# EAGLE board LautIO (EAGLE 9.6.2), part 1 of 2
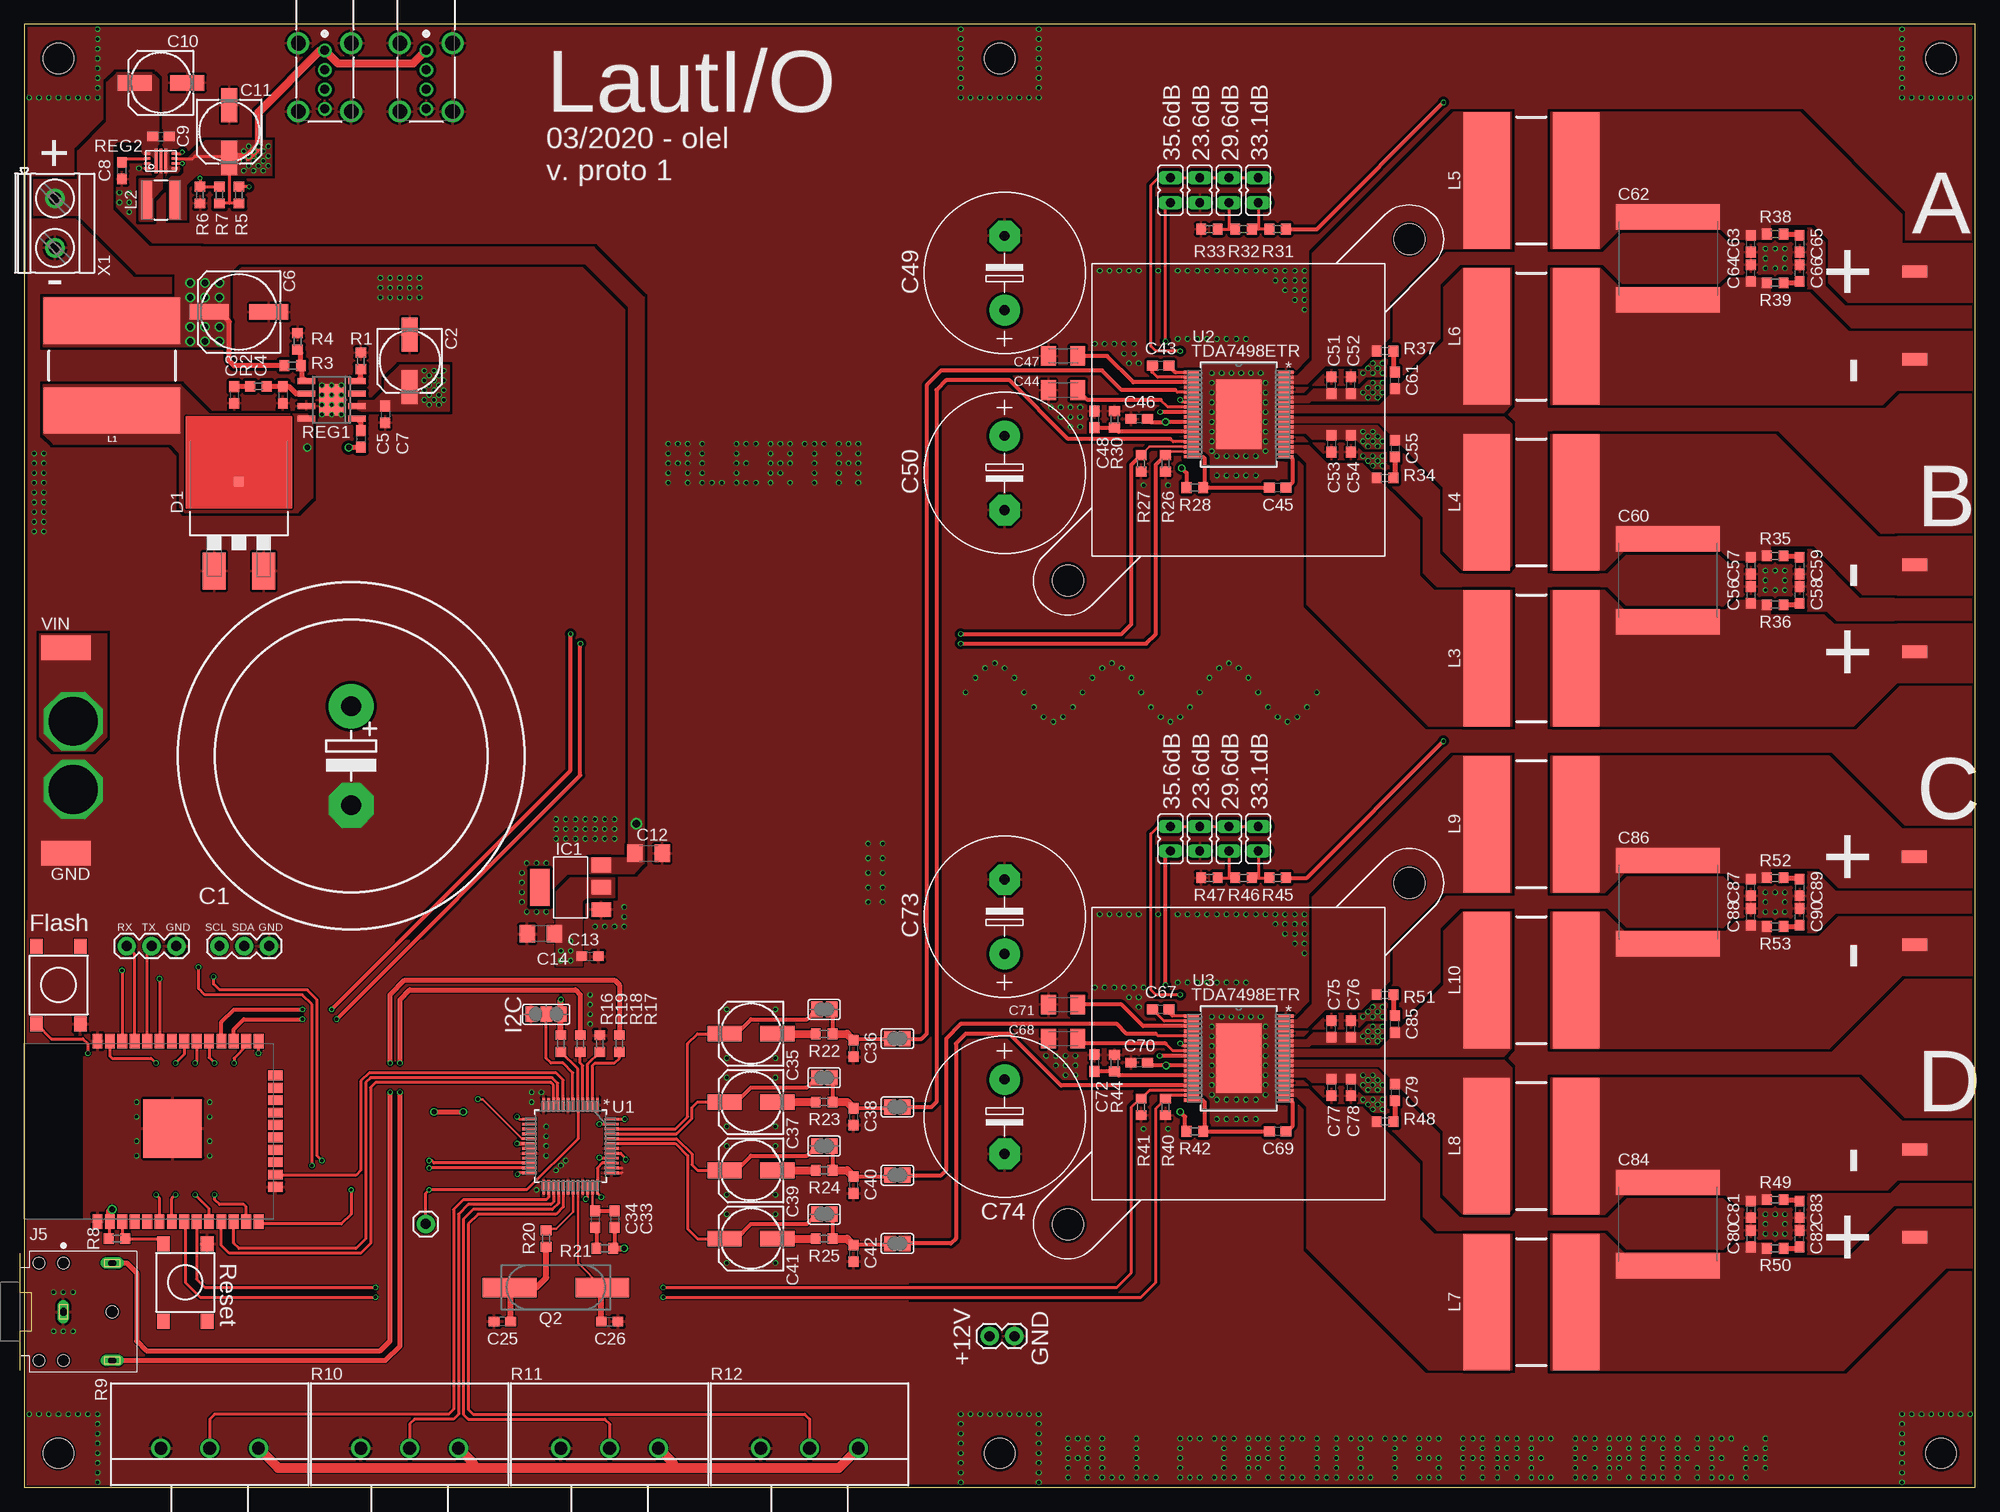
[diagram p0: board, top side]
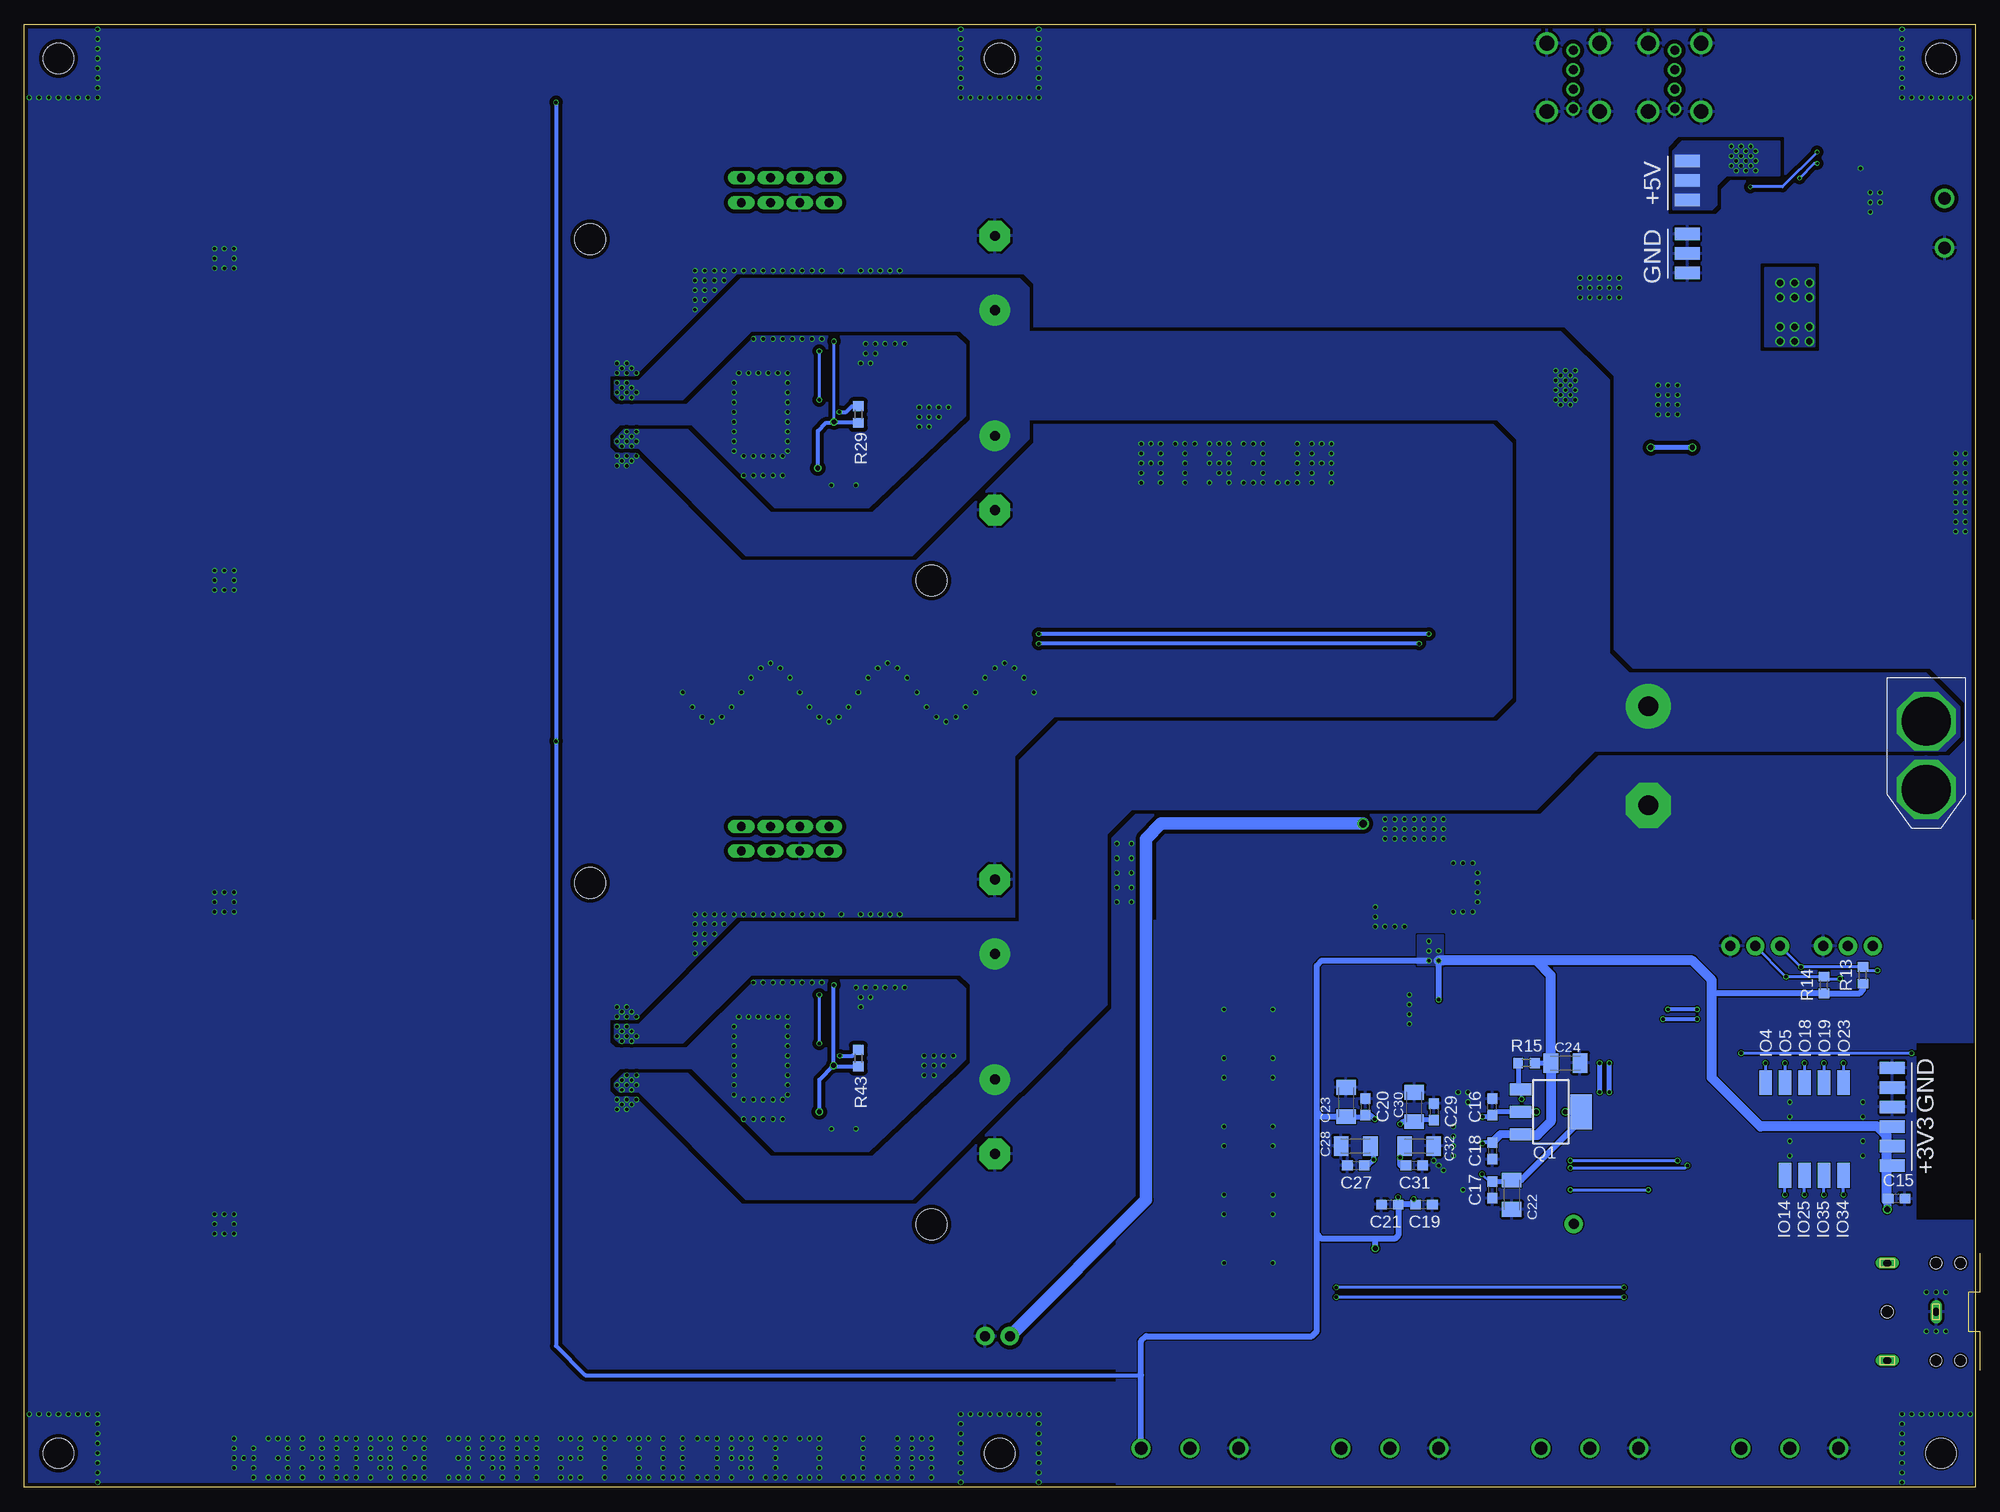
[diagram p1: board, bottom side, seen from below]

Size 200 x 150 mm. Coordinates in mm from the lower left corner, seen from the top.
Outline: 0,0 200,0 200,150 0,150 0,0
Copper layers (1*16): Top 0.035559375mm / dielectric 1.6mm / Bottom 0.035559375mm
Design rules "jlcpcb2layer": minimum track width 5mil, minimum drill 12mil, track to track 5mil, track to pad 5mil, pad to pad 5mil, via to via 5mil, smd to smd 5mil, copper to edge 8mil, drill to drill 6mil, minimum pad ring 5mil, minimum via ring 3mil, stop-mask expansion 2.5mil, vias tented up to drill 0mil, thermal gap 10mil
Holes 3.1 mm at 3.5,146.5 3.5,3.5 196.5,3.5 196.5,146.5 100,3.5 100,146.5

## Footprints (pad centres in the part's own frame; a part is rotated, then mirrored left to right if it is on the bottom)
EB35D = drill 2.007 pad 4.597: + -5.08,0 | drill 2.007 pad 4.597 octagon: - 5.08,0
153CLV-0605 = smd 3.5 x 1.6: + 2.7,0; - -2.7,0
C0603 = smd 1.1 x 1: 1 -0.85,0; 2 0.85,0
153CLV-0807 = smd 4 x 1.6: + 3.05,0; - -3.05,0
C1206 = smd 1.6 x 1.8: 1 -1.4,0; 2 1.4,0
C1206K = smd 1.5 x 2: 1 -1.5,0; 2 1.5,0
E7,5-16 = drill 1.016 pad 3.15: + -3.81,0 | drill 1.016 pad 3.15 octagon: - 3.81,0
C3640 = smd 2.6 x 10.7: 1 -4.267,0; 2 4.267,0
TO-263/D2PAK = smd 2.32 x 3.81: 1 -2.54,-7.045; 3 2.54,-7.045 | smd 1 x 1: 2 0,2.125
ESP-WROOM-32 = smd 1.5 x 1: 1 -9.25,7; 2 -9.25,5.73; 3 -9.25,4.46; 4 -9.25,3.19; 5 -9.25,1.92; 6 -9.25,0.65; 7 -9.25,-0.62; 8 -9.25,-1.89; 9 -9.25,-3.16; 10 -9.25,-4.43; 11 -9.25,-5.7; 12 -9.25,-6.97; 13 -9.25,-8.24; 14 -9.25,-9.51; 25 9.25,-9.51; 26 9.25,-8.24; 27 9.25,-6.97; 28 9.25,-5.7; 29 9.25,-4.43; 30 9.25,-3.16; 31 9.25,-1.89; 32 9.25,-0.62; 33 9.25,0.65; 34 9.25,1.92; 35 9.25,3.19; 36 9.25,4.46; 37 9.25,5.73; 38 9.25,7 | smd 1 x 1.5: 15 -5.7,-11.25; 16 -4.43,-11.25; 17 -3.16,-11.25; 18 -1.89,-11.25; 19 -0.62,-11.25; 20 0.65,-11.25; 21 1.92,-11.25; 22 3.19,-11.25; 23 4.46,-11.25; 24 5.73,-11.25 | smd 6 x 6: GND 0.3,-0.7
SMD2,54-5,08 = smd 2.54 x 5.08: 1 0,0
SOT223 = smd 1.499 x 2.007: 1 -2.261,-3.15; 2 0.025,-3.15; 3 2.311,-3.15 | smd 3.81 x 2.007: 4 0,3.15
SMD1,27-2,54 = smd 1.27 x 2.54: 1 0,0
614004134726 = drill 0.92: 1 0,2.41; 2 0,4.41; 3 0,6.41; 4 0,8.41 | drill 1.5: S1 -2.71,8.68; S2 2.71,8.68; S3 2.71,1.68; S4 -2.71,1.68
1X03 = drill 1.016 pad 1.88: 1 0,0; 2 2.54,0; 3 5.08,0
CUI_SJ1-3523N = drill 0.8 long: 1 0,0; 2 5,-5; 3 5,5 | hole 1.2: -2.5,5; 0,5; 5,0; -2.5,-5; 0,-5
1X01 = drill 1.016 pad 1.88: 1 0,0
1X02 = drill 1.016 pad 1.88: 1 0,0; 2 2.54,0
JP1 = drill 0.914 long: 1 0,-1.27; 2 0,1.27
INDUCTOR_SDR1307 = smd 14 x 4.75: P$1 0,4.6; P$2 0,-4.6
INDUCTOR_4X4MM = smd 4.089 x 1.143: P$1 0,1.473; P$2 0,-1.473
SOT223' = smd 1.219 x 2.235: 1 -2.311,-3.099; 2 0,-3.099; 3 2.311,-3.099 | smd 3.6 x 2.2: 4 0,3.099
CSM-7X-DU = smd 5.5 x 2: 1 -4.75,0; 2 4.75,0
R0603 = smd 1 x 1.1: 1 -0.85,0; 2 0.85,0
CIP20C-6MM = drill 1.3 pad 1.93: A -5,0; E 5,0; S 0,0
HSOP8 = smd 0.6 x 1.8: 1 -1.905,-2.6; 2 -0.635,-2.6; 3 0.635,-2.6; 4 1.905,-2.6; 5 1.905,2.6; 6 0.635,2.6; 7 -0.635,2.6; 8 -1.905,2.6 | smd 3.2 x 2.51: EXP 0,0
RGX0011A = smd 2.5 x 0.3: 1 0,0.5; 2 0,0; 3 0,-0.5 | smd 0.25 x 0.6: 4 -0.75,-1.4; 5 -0.25,-1.4; 6 0.25,-1.4; 7 0.75,-1.4; 8 0.75,1.4; 9 0.25,1.4; 10 -0.25,1.4; 11 -0.75,1.4
TACTILE_SWITCH_SMD_6.2MM_TALL = smd 1.55 x 1.3: A1 -3.975,-2.25; A2 3.975,-2.25; B1 -3.975,2.25; B2 3.975,2.25
SJ_2 = smd 1.168 x 1.6: 1 -1.524,0; 2 0,0; 3 1.524,0
SJ = smd 1.168 x 1.6: 1 -0.762,0; 2 0.762,0
ST_48_ADI = smd 1.462 x 0.279: 1 -4.216,2.75; 2 -4.216,2.25; 3 -4.216,1.75; 4 -4.216,1.25; 5 -4.216,0.75; 6 -4.216,0.25; 7 -4.216,-0.25; 8 -4.216,-0.75; 9 -4.216,-1.25; 10 -4.216,-1.75; 11 -4.216,-2.25; 12 -4.216,-2.75; 25 4.216,-2.75; 26 4.216,-2.25; 27 4.216,-1.75; 28 4.216,-1.25; 29 4.216,-0.75; 30 4.216,-0.25; 31 4.216,0.25; 32 4.216,0.75; 33 4.216,1.25; 34 4.216,1.75; 35 4.216,2.25; 36 4.216,2.75 | smd 0.279 x 1.462: 13 -2.75,-4.216; 14 -2.25,-4.216; 15 -1.75,-4.216; 16 -1.25,-4.216; 17 -0.75,-4.216; 18 -0.25,-4.216; 19 0.25,-4.216; 20 0.75,-4.216; 21 1.25,-4.216; 22 1.75,-4.216; 23 2.25,-4.216; 24 2.75,-4.216; 37 2.75,4.216; 38 2.25,4.216; 39 1.75,4.216; 40 1.25,4.216; 41 0.75,4.216; 42 0.25,4.216; 43 -0.25,4.216; 44 -0.75,4.216; 45 -1.25,4.216; 46 -1.75,4.216; 47 -2.25,4.216; 48 -2.75,4.216
SSO36_TDA7498ETR_STM = smd 1.538 x 0.356: 1 4.826,4.318; 2 4.826,3.81; 3 4.826,3.302; 4 4.826,2.794; 5 4.826,2.286; 6 4.826,1.778; 7 4.826,1.27; 8 4.826,0.762; 9 4.826,0.254; 10 4.826,-0.254; 11 4.826,-0.762; 12 4.826,-1.27; 13 4.826,-1.778; 14 4.826,-2.286; 15 4.826,-2.794; 16 4.826,-3.302; 17 4.826,-3.81; 18 4.826,-4.318; 19 -4.826,-4.318; 20 -4.826,-3.81; 21 -4.826,-3.302; 22 -4.826,-2.794; 23 -4.826,-2.286; 24 -4.826,-1.778; 25 -4.826,-1.27; 26 -4.826,-0.762; 27 -4.826,-0.254; 28 -4.826,0.254; 29 -4.826,0.762; 30 -4.826,1.27; 31 -4.826,1.778; 32 -4.826,2.286; 33 -4.826,2.794; 34 -4.826,3.302; 35 -4.826,3.81; 36 -4.826,4.318 | smd 4.699 x 7.112: EPAD 0,0
XT60 = drill 5 octagon: + 4.5,0; - 11.5,0
ATS-CPX030030030 = hole 3.175: -2.519,-2.534; 32.481,32.466
MKDSN1,5/2-5,08 = drill 1.3 pad 2: 1 -2.561,0.025; 2 2.519,0.025

## Placement (x,y rotation side)
C1  10000µF  [EB35D]  33.5,75 270 top
C2  10µF  [153CLV-0605]  39.5,115.5 270 top
C3  1.2nF  [C0603]  21.5,112 270 top
C4  6.8pF  [C0603]  26.5,112 270 top
C5  100nF  [C0603]  34.5,107.5 270 top
C6  47µF  [153CLV-0807]  22,120.5 180 top
C7  100nF  [C0603]  37,110 270 top
C8  2.2nF  [C0603]  10,135 90 top
C9  100nF  [C0603]  14,138.5 0 top
C10  10µF  [153CLV-0605]  14,144 180 top
C11  10µF  [153CLV-0605]  21,139 270 top
C12  10µF  [C1206]  64,65 0 top
C13  10µF  [C1206]  52.95,56.75 180 top
C14  100nF  [C0603]  58,54.45 0 top
C15  100nF  [C0603]  8.05,29.6 180 bottom
C16  100n  [C0603]  49.5,39 90 bottom
C17  100n  [C0603]  49.5,30.5 270 bottom
C18  100n  [C0603]  49.5,34.5 270 bottom
C19  100n  [C0603]  56.5,29 0 bottom
C20  100n  [C0603]  62.5,39 90 bottom
C21  100n  [C0603]  60,29 180 bottom
C22  10µF  [C1206K]  47.5,30 270 bottom
C23  10µF  [C1206K]  64.5,39.5 90 bottom
C24  10µF  [C1206K]  42,43.5 0 bottom
C25  22pF  [C0603]  49,17 180 top
C26  22pF  [C0603]  60,17 0 top
C27  100n  [C0603]  63.5,33 0 bottom
C28  10µF  [C1206K]  63.5,35 0 bottom
C29  100n  [C0603]  55.5,38.5 270 bottom
C30  10µF  [C1206K]  57.5,39 270 bottom
C31  100n  [C0603]  57.5,33 180 bottom
C32  47µF  [C1206K]  57,35 180 bottom
C33  3.3nF  [C0603]  60.5,27.5 270 top
C34  56nF  [C0603]  58.5,27.5 270 top
C35  47µF  [153CLV-0605]  74.5,46.5 180 top
C36  5.6nF  [C0603]  85,45 270 top
C37  47µF  [153CLV-0605]  74.5,39.5 180 top
C38  5.6nF  [C0603]  85,38 270 top
C39  47µF  [153CLV-0605]  74.5,32.5 180 top
C40  5.6nF  [C0603]  85,31 270 top
C41  47µF  [153CLV-0605]  74.5,25.5 180 top
C42  5.6nF  [C0603]  85,24 270 top
C43  100nF  [C0603]  116.5,115 180 top
C44  10µF  [C1206K]  106.5,112.5 180 top
C45  100nF  [C0603]  128.5,102.5 180 top
C46  100nF  [C0603]  114.3,109.55 180 top
C47  10µF  [C1206K]  106.5,116 180 top
C48  100nF  [C0603]  109.7,109.5 270 top
C49  1000µF  [E7,5-16]  100.5,124.5 90 top
C50  1000µF  [E7,5-16]  100.5,104 270 top
C51  1µF  [C0603]  134,113 90 top
C52  100nF  [C0603]  136,113 90 top
C53  1µF  [C0603]  134,107 270 top
C54  100nF  [C0603]  136,107 270 top
C55  330pF  [C0603]  140.5,106.5 270 top
C56  220nF  [C0603]  177,91.5 270 top
C57  220nF  [C0603]  177,94.5 270 top
C58  220nF  [C0603]  182,91.5 90 top
C59  220nF  [C0603]  182,94.5 270 top
C60  1µF  [C3640]  168.5,93 90 top
C61  330pF  [C0603]  140.5,113.5 90 top
C62  1µF  [C3640]  168.5,126 270 top
C63  220nF  [C0603]  177,127.5 90 top
C64  220nF  [C0603]  177,124.5 90 top
C65  220nF  [C0603]  182,127.5 270 top
C66  220nF  [C0603]  182,124.5 90 top
C67  100nF  [C0603]  116.5,49 180 top
C68  10µF  [C1206K]  106.5,46 180 top
C69  100nF  [C0603]  128.5,36.5 180 top
C70  100nF  [C0603]  114.3,43.55 180 top
C71  10µF  [C1206K]  106.5,49.5 180 top
C72  100nF  [C0603]  109.7,43.5 270 top
C73  1000µF  [E7,5-16]  100.5,58.5 90 top
C74  1000µF  [E7,5-16]  100.5,38 270 top
C75  1µF  [C0603]  134,47 90 top
C76  100nF  [C0603]  136,47 90 top
C77  1µF  [C0603]  134,41 270 top
C78  100nF  [C0603]  136,41 270 top
C79  330pF  [C0603]  140.5,40.5 270 top
C80  220nF  [C0603]  177,25.5 270 top
C81  220nF  [C0603]  177,28.5 270 top
C82  220nF  [C0603]  182,25.5 90 top
C83  220nF  [C0603]  182,28.5 270 top
C84  1µF  [C3640]  168.5,27 90 top
C85  330pF  [C0603]  140.5,47.5 90 top
C86  1µF  [C3640]  168.5,60 270 top
C87  220nF  [C0603]  177,61.5 90 top
C88  220nF  [C0603]  177,58.5 90 top
C89  220nF  [C0603]  182,61.5 270 top
C90  220nF  [C0603]  182,58.5 90 top
D1  STPS20M100SG-TR  [TO-263/D2PAK]  22,101 0 top
ESP  ESP-WROOM-32  [ESP-WROOM-32]  14.5,36.5 90 top
GND  [SMD2,54-5,08]  4.28,65.01 90 top
IC1  REG1117  [SOT223]  56,61.5 90 top
IO4  [SMD1,27-2,54]  21.5,41.5 0 bottom
IO5  [SMD1,27-2,54]  19.5,41.5 0 bottom
IO14  [SMD1,27-2,54]  19.5,32 0 bottom
IO18  [SMD1,27-2,54]  17.5,41.5 0 bottom
IO19  [SMD1,27-2,54]  15.5,41.5 0 bottom
IO23  [SMD1,27-2,54]  13.5,41.5 0 bottom
IO25  [SMD1,27-2,54]  17.5,32 0 bottom
IO34  [SMD1,27-2,54]  13.5,32 0 bottom
IO35  [SMD1,27-2,54]  15.5,32 0 bottom
J1  614004134726  [614004134726]  30.8,149.75 180 top
J2  614004134726  [614004134726]  41.2,149.75 180 top
J3  455-1750-1-ND  [1X03]  10.5,55.5 0 top
J4  455-1750-1-ND  [1X03]  20,55.5 0 top
J5  SJ1-3523N  [CUI_SJ1-3523N]  4,18 0 top
J6  [1X01]  41.15,27 0 top
J7  [1X02]  101.5,15.5 180 top
JP1  [JP1]  126.5,133 0 top
JP2  [JP1]  123.5,133 0 top
JP3  [JP1]  120.5,133 0 top
JP4  [JP1]  117.5,133 0 top
JP5  [JP1]  126.5,66.5 0 top
JP6  [JP1]  123.5,66.5 0 top
JP7  [JP1]  120.5,66.5 0 top
JP8  [JP1]  117.5,66.5 0 top
L1  15µH  [INDUCTOR_SDR1307]  9,115 180 top
L2  1µH  [INDUCTOR_4X4MM]  14,132 90 top
L3  15µH  [INDUCTOR_SDR1307]  154.5,85 90 top
L4  15µH  [INDUCTOR_SDR1307]  154.5,101 90 top
L5  15µH  [INDUCTOR_SDR1307]  154.5,134 90 top
L6  15µH  [INDUCTOR_SDR1307]  154.5,118 90 top
L7  15µH  [INDUCTOR_SDR1307]  154.5,19 90 top
L8  15µH  [INDUCTOR_SDR1307]  154.5,35 90 top
L9  15µH  [INDUCTOR_SDR1307]  154.5,68 90 top
L10  15µH  [INDUCTOR_SDR1307]  154.5,52 90 top
OUT_A_+  [SMD1,27-2,54]  193.8,124.65 90 top
OUT_A_-  [SMD1,27-2,54]  193.8,115.65 90 top
OUT_B_+  [SMD1,27-2,54]  193.8,85.65 90 top
OUT_B_-  [SMD1,27-2,54]  193.8,94.6 90 top
OUT_C_+  [SMD1,27-2,54]  193.75,64.65 270 top
OUT_C_-  [SMD1,27-2,54]  193.8,55.65 270 top
OUT_D_+  [SMD1,27-2,54]  193.8,25.65 270 top
OUT_D_-  [SMD1,27-2,54]  193.8,34.65 270 top
PAD1  [SMD1,27-2,54]  8.5,41 270 bottom
PAD2  [SMD1,27-2,54]  8.5,33 270 bottom
PAD3  [SMD1,27-2,54]  8.5,43 270 bottom
PAD4  [SMD1,27-2,54]  8.5,37 270 bottom
PAD5  [SMD1,27-2,54]  29.5,132 270 bottom
PAD6  [SMD1,27-2,54]  29.5,134 270 bottom
PAD7  [SMD1,27-2,54]  29.5,136 270 bottom
PAD8  [SMD1,27-2,54]  29.5,124.5 270 bottom
PAD9  [SMD1,27-2,54]  29.5,126.5 270 bottom
PAD10  [SMD1,27-2,54]  8.5,35 270 bottom
PAD11  [SMD1,27-2,54]  8.5,39 270 bottom
PAD12  [SMD1,27-2,54]  29.5,128.5 270 bottom
Q1  ZX5T953  [SOT223']  43.5,38.5 270 bottom
Q2  12.288MHz  [CSM-7X-DU]  54.5,20.5 180 top
R1  187kΩ  [R0603]  34.5,115.5 270 top
R2  44.2kΩ  [R0603]  24,112.88 0 top
R3  147kΩ  [R0603]  27.5,115 180 top
R4  10.5kΩ  [R0603]  28,117.5 270 top
R5  100kΩ  [R0603]  22,132.5 270 top
R6  100kΩ  [R0603]  18,132.5 90 top
R7  619kΩ  [R0603]  20,132.5 270 top
R8  10kΩ  [R0603]  9.5,25.5 180 top
R9  [CIP20C-6MM]  19,4 0 top
R10  [CIP20C-6MM]  39.5,4 0 top
R11  [CIP20C-6MM]  60,4 0 top
R12  [CIP20C-6MM]  80.5,4 0 top
R13  4.7kΩ  [R0603]  11.5,52.5 90 bottom
R14  4.7kΩ  [R0603]  15.5,51.5 90 bottom
R15  1kΩ  [R0603]  46,43.5 0 bottom
R16  10kΩ  [R0603]  55,45.5 90 top
R17  18kΩ  [R0603]  61,45.5 90 top
R18  18kΩ  [R0603]  59,45.5 90 top
R19  18kΩ  [R0603]  57,45.5 90 top
R20  100Ω  [R0603]  53.5,25.5 270 top
R21  475Ω  [R0603]  59.5,24.5 180 top
R22  560Ω  [R0603]  82,46.5 180 top
R23  560Ω  [R0603]  82,39.5 180 top
R24  560Ω  [R0603]  82,32.5 180 top
R25  560Ω  [R0603]  82,25.5 180 top
R26  10kΩ  [R0603]  117,105 90 top
R27  10kΩ  [R0603]  114.5,105 90 top
R28  22Ω  [R0603]  120,102.5 0 top
R29  47kΩ  [R0603]  114.5,110 270 bottom
R30  10kΩ  [R0603]  111.75,109.5 270 top
R31  100kΩ  [R0603]  128.5,129 0 top
R32  100kΩ  [R0603]  125,129 0 top
R33  100kΩ  [R0603]  121.5,129 0 top
R34  22Ω  [R0603]  139.5,103.5 180 top
R35  8Ω  [R0603]  179.5,95.5 0 top
R36  8Ω  [R0603]  179.5,90.5 0 top
R37  22Ω  [R0603]  139.5,116.5 180 top
R38  8Ω  [R0603]  179.5,128.5 0 top
R39  8Ω  [R0603]  179.5,123.5 0 top
R40  10kΩ  [R0603]  117,39 90 top
R41  10kΩ  [R0603]  114.5,39 90 top
R42  22Ω  [R0603]  120,36.5 0 top
R43  47kΩ  [R0603]  114.5,44 270 bottom
R44  10kΩ  [R0603]  111.75,43.5 270 top
R45  100kΩ  [R0603]  128.5,62.5 0 top
R46  100kΩ  [R0603]  125,62.5 0 top
R47  100kΩ  [R0603]  121.5,62.5 0 top
R48  22Ω  [R0603]  139.5,37.5 180 top
R49  8Ω  [R0603]  179.5,29.5 0 top
R50  8Ω  [R0603]  179.5,24.5 0 top
R51  22Ω  [R0603]  139.5,50.5 180 top
R52  8Ω  [R0603]  179.5,62.5 0 top
R53  8Ω  [R0603]  179.5,57.5 0 top
REG1  TPS54560B-Q1  [HSOP8]  31.5,111.5 90 top
REG2  TPS621351RGXR  [RGX0011A]  14,136 90 top
S1  MOMENTARY-SWITCH-SPST-SMD-6.2MM-TALL  [TACTILE_SWITCH_SMD_6.2MM_TALL]  16.5,21 90 top
S2  MOMENTARY-SWITCH-SPST-SMD-6.2MM-TALL  [TACTILE_SWITCH_SMD_6.2MM_TALL]  3.5,51.5 270 top
SJ1  [SJ_2]  53.5,48.5 0 top
SJ2  [SJ]  89.5,39 0 top
SJ3  [SJ]  89.5,46 0 top
SJ4  [SJ]  89.5,32 0 top
SJ5  [SJ]  89.5,25 0 top
SJ6  [SJ]  82,49 0 top
SJ7  [SJ]  82,42 0 top
SJ8  [SJ]  82,35 0 top
SJ9  [SJ]  82,28 0 top
U1  ADAU1701JSTZ  [ST_48_ADI]  56,35 270 top
U2  TDA7498ETR  [SSO36_TDA7498ETR_STM]  124.5,110 0 top
U3  TDA7498ETR  [SSO36_TDA7498ETR_STM]  124.5,44 0 top
U$1  XT60  [XT60]  5.01,83.05 270 bottom
U$2  ATS-CPX030030030  [ATS-CPX030030030]  109.5,95.5 0 top
U$3  ATS-CPX030030030  [ATS-CPX030030030]  109.5,29.5 0 top
VIN  [SMD2,54-5,08]  4.28,86.09 90 top
X1  MKDSN1,5/2-5,08  [MKDSN1,5/2-5,08]  3.1,129.6 270 top

## Library data of the parts
C1-C90 = rcl; SPICEPREFIX: C
D1 REG1 U$2 U$3 = olelib
ESP = esp32
GND IO4 IO5 IO14 IO18 IO19 IO23 IO25 IO34 IO35 OUT_A_+ OUT_A_- OUT_B_+ OUT_B_- OUT_C_+ OUT_C_- OUT_D_+ OUT_D_- PAD1-PAD12 VIN = wirepad
IC1 = burr-brown; MPN: REG1117; OC_FARNELL: 1097566; OC_NEWARK: 14P6981
J1 J2 = o163744v244+Eagle_WR-USB+(rev20e); APPLICATION: USB 2.0; DATASHEET-URL: https://www.we-online.com/catalog/datasheet/614004134726.pdf; GERDER: Receptacle; INTERFACE-TYPE: Type A; IR1: 1.5A; MOUNT: THT; PACKAGING: Tray; PART-NUMBER: 614004134726; PINS: 4; TYPE: Up Right; WORKING-VOLTAGE: 30V(AC)
J3 J4 = SparkFun-Connectors; PROD_ID: XXX-00000
J5 = SJ1-3523N; MANUFACTURER: CUI; PARTREV: 1.02; STANDARD: Manufacturer recommendation
J6 J7 = SparkFun-Connectors
JP1-JP8 SJ1-SJ9 = jumper
L1 L3-L10 = SparkFun-Coils; PROD_ID: NDUC-12529
L2 = SparkFun-Coils; PROD_ID: NDUC-15245
Q1 = transistor-pnp
Q2 = crystal; OC_FARNELL: unknown; OC_NEWARK: unknown
R1-R8 R13-R53 = rcl; SPICEPREFIX: R
R9-R12 = pot
REG2 = TPS621351RGXR; AVAILABILITY: Warning; DESCRIPTION: 3-17V 4.0A Step-Down Converter with 1% accuracy and PFM/Forced-PWM in 2x3QFN 11-VQFN-HR -40 to 125; MF: Texas Instruments; MP: TPS621351RGXR; PACKAGE: VQFN-HR-11 Texas Instruments; PRICE: None; PURCHASE-URL: https://pricing.snapeda.com/search/part/TPS621351RGXR/?ref=eda
S1 S2 = SparkFun-Switches; PROD_ID: SWCH-11966; SF_SKU: COM-12992
U1 = olelib; BUILT_BY: EMA_UL_Team; MANUFACTURER_PART_NUMBER: ADAU1701JSTZ; SOURCELIBRARY: Analog_2015-01-06; VENDOR: Analog Devices Inc
U2 U3 = olelib; BUILT_BY: EMA_Kyle; COPYRIGHT: Copyright (C) 2018 Accelerated Designs. All rights reserved; DATASHEET: https://www.st.com/resource/en/datasheet/tda7498e.pdf; MANUFACTURER_PART_NUMBER: TDA7498ETR; SOURCELIBRARY: Add_to_database_2020-10-27; VENDOR: STMicroelectronics
U$1 = XT60
X1 = con-phoenix-508

## Nets
+3V3: C13.1 C14.1 C15.2 C18.1 C19.1 C20.1 C21.1 C23.1 C24.1 C33.2 ESP.2 IC1.2 PAD2.1 PAD4.1 PAD10.1 Q1.3 R8.2 R9.E R10.E R11.E R12.E R13.1 R14.1 R15.2 R16.2 R21.1 R31.2 R45.2 SJ1.3 U1.18 U1.34 U1.36 U1.39 U1.48
+5V: C11.+ J1.1 J2.1 L2.P$2 PAD5.1 PAD6.1 PAD7.1 R5.2 R7.2 REG2.6
+12V: C6.+ C9.1 C10.+ C12.1 IC1.3 J7.2 L1.P$2 R3.2 REG2.1 REG2.8 X1.1
A_LINE_A: C36.1 R22.1 SJ3.1 SJ6.2
A_LINE_B: C38.1 R23.1 SJ2.1 SJ7.2
A_LINE_C: C40.1 R24.1 SJ4.1 SJ8.2
A_LINE_D: C42.1 R25.1 SJ5.1 SJ9.2
AMP1_GAIN: JP1.2 JP2.2 JP3.2 JP4.2 U2.30
AMP1_IN_A: SJ2.2 U2.22
AMP1_IN_B: SJ3.2 U2.32
AMP1_MUTE: ESP.28 R27.2 U2.21
AMP1_OUTA_N: C55.1 L4.P$1 U2.10 U2.11
AMP1_OUTA_P: L3.P$1 R34.2 U2.16 U2.17
AMP1_OUTB_N: C61.1 L6.P$1 U2.8 U2.9
AMP1_PGND: C45.1 U2.18
AMP1_ROSC: C48.2 R30.2 U2.24
AMP1_STANDBY: ESP.27 R26.2 U2.20
AMP1_SYNCLK: U2.25
AMP1_VDDPW: C45.2 R28.2 U2.19
AMP1_VDDS: C46.1 JP4.1 R28.1 R29.2 U2.26
AMP1_VREF: C47.1 U2.34
AMP1_VSS: C43.1 U2.36
AMP2_GAIN: JP5.2 JP6.2 JP7.2 JP8.2 U3.30
AMP2_IN_A: SJ5.2 U3.22
AMP2_IN_B: SJ4.2 U3.32
AMP2_MUTE: ESP.9 R41.2 U3.21
AMP2_OUTA_N: C79.1 L8.P$1 U3.10 U3.11
AMP2_OUTA_P: L7.P$1 R48.2 U3.16 U3.17
AMP2_OUTB_N: C85.1 L10.P$1 U3.8 U3.9
AMP2_OUTB_P: L9.P$1 R51.2 U3.2 U3.3
AMP2_PGND: C69.1 U3.18
AMP2_ROSC: C72.2 R44.2 U3.24
AMP2_STANDBY: ESP.8 R40.2 U3.20
AMP2_SYNCLK: U3.25
AMP2_VDDPW: C69.2 R42.2 U3.19
AMP2_VDDS: C70.1 JP8.1 R42.1 R43.2 U3.26
AMP2_VREF: C71.1 U3.34
AMP2_VSS: C67.1 U3.36
AMP3_OUTB_P: L5.P$1 R37.2 U2.2 U2.3
DSP_DVDD: C16.1 C17.1 C22.1 Q1.2 Q1.4 U1.13 U1.24
DSP_IN_BCLK: ESP.12 U1.9
DSP_IN_LRCLK: ESP.16 U1.8
DSP_IN_SDATA0: ESP.11 U1.10
DSP_IN_SDATA1: U1.11
DSP_MCLKI: C26.1 Q2.1 U1.32
DSP_OSCO: R20.1 U1.31
DSP_OUT_BCLK: U1.19
DSP_OUT_LRCLK: U1.16
DSP_OUT_SDATA0: U1.15
DSP_OUT_SDATA1: U1.14
DSP_RESET: ESP.14 J6.1 R16.1 U1.5
DSP_SELFBOOT: SJ1.2 U1.6
DSP_VDRIVE: Q1.1 R15.1 U1.17
DSP_VOUT0: C35.+ SJ6.1 U1.46
DSP_VOUT1: C37.+ SJ7.1 U1.45
DSP_VOUT2: C39.+ SJ8.1 U1.44
DSP_VOUT3: C41.+ SJ9.1 U1.43
ESP_CLK: ESP.20
ESP_CMD: ESP.19
ESP_EN: ESP.3 R8.1 S1.B2
ESP_IO0: ESP.25 S2.A2
ESP_IO2: ESP.24
ESP_IO4: ESP.26 IO4.1
ESP_IO5: ESP.29 IO5.1
ESP_IO14: ESP.13 IO14.1
ESP_IO15: ESP.23
ESP_IO18: ESP.30 IO18.1
ESP_IO19: ESP.31 IO19.1
ESP_IO23: ESP.37 IO23.1
ESP_IO25: ESP.10 IO25.1
ESP_IO34: ESP.6 IO34.1
ESP_IO35: ESP.7 IO35.1
ESP_RXD0: ESP.34 J3.2
ESP_SD0: ESP.21
ESP_SD1: ESP.22
ESP_SD2: ESP.17
ESP_SD3: ESP.18
ESP_SENSOR_VN: ESP.5
ESP_SENSOR_VP: ESP.4
ESP_TXD0: ESP.35 J3.1
GND: C1.- C2.- C3.2 C4.2 C6.- C7.2 C8.1 C9.2 C10.- C11.- C12.2 C13.2 C14.2 C15.1 C16.2 C17.2 C18.2 C19.2 C20.2 C21.2 C22.2 C23.2 C24.2 C25.2 C26.2 C27.1 C28.1 C29.1 C30.1 C31.1 C32.1 C36.2 C38.2 C40.2 C42.2 C44.2 C46.2 C47.2 C48.1 C49.- C50.- C51.2 C52.2 C53.2 C54.2 C56.1 C57.2 C58.2 C59.2 C63.1 C64.2 C65.2 C66.2 C68.2 C70.2 C71.2 C72.1 C73.- C74.- C75.2 C76.2 C77.2 C78.2 C80.1 C81.2 C82.2 C83.2 C87.1 C88.2 C89.2 C90.2 D1.1 D1.3 ESP.1 ESP.15 ESP.38 ESP.GND GND.1 IC1.1 J1.4 J1.S1 J1.S2 J1.S3 J1.S4 J2.4 J2.S1 J2.S2 J2.S3 J2.S4 J3.3 J4.3 J5.1 J7.1 JP3.1 JP7.1 PAD1.1 PAD3.1 PAD8.1 PAD9.1 PAD11.1 PAD12.1 R1.1 R4.1 R6.1 R9.A R10.A R11.A R12.A R18.2 R26.1 R27.1 R30.1 R33.1 R40.1 R41.1 R44.1 R47.1 REG1.7 REG1.EXP REG2.3 REG2.4 REG2.10 REG2.11 S1.A2 S2.B2 SJ1.1 U1.1 U1.7 U1.12 U1.20 U1.25 U1.30 U1.33 U1.37 U1.38 U1.42 U2.1 U2.4 U2.5 U2.14 U2.15 U2.23 U2.27 U2.31 U2.33 U2.EPAD U3.1 U3.4 U3.5 U3.14 U3.15 U3.23 U3.27 U3.31 U3.33 U3.EPAD U$1.- X1.2
I2C_SCL: ESP.36 J4.1 R13.2 U1.23
I2C_SDA: ESP.33 J4.2 R14.2 U1.22
LINEIN_SW_L: J5.2 R19.2
LINEIN_SW_R: J5.3 R17.2
N$1: R1.2 REG1.4
N$2: C4.1 R2.2 REG1.6
N$3: C3.1 R2.1
N$4: C5.1 REG1.1
N$5: R6.2 R7.1 REG2.5
N$6: R3.1 R4.2 REG1.5
N$7: L2.P$1 REG2.2
N$8: R5.1 REG2.7
N$9: R17.1 U1.2
N$10: R18.1 U1.3
N$11: C8.2 REG2.9
N$12: R19.1 U1.4
N$13: C25.1 Q2.2 R20.2
N$14: C27.2 C28.2 U1.41
N$15: C31.2 C32.2 U1.40
N$16: C29.2 C30.2 U1.47
N$17: C33.1 C34.1 U1.35
N$18: C34.2 R21.2
N$19: C35.- R22.2
N$20: C37.- R23.2
N$21: C43.2 U2.35
N$22: C44.1 U2.29
N$23: C39.- R24.2
N$24: R29.1 U2.28
N$25: JP1.1 R31.1 R32.2
N$26: C41.- R25.2
N$27: JP2.1 R32.1 R33.2
N$28: C55.2 R34.1
N$29: C59.1 R35.2
N$30: C58.1 R36.2
N$31: C61.2 R37.1
N$32: C65.1 R38.2
N$33: C66.1 R39.2
N$34: C67.2 U3.35
N$35: C68.1 U3.29
N$36: R43.1 U3.28
N$37: JP5.1 R45.1 R46.2
N$38: JP6.1 R46.1 R47.2
N$39: C79.2 R48.1
N$40: C83.1 R49.2
N$41: C82.1 R50.2
N$42: C85.2 R51.1
N$43: C89.1 R52.2
N$44: C90.1 R53.2
OUTA_N: C62.2 C64.1 L6.P$2 OUT_A_-.1 R39.1
OUTA_P: C62.1 C63.2 L5.P$2 OUT_A_+.1 R38.1
OUTB_N: C57.1 C60.2 L4.P$2 OUT_B_-.1 R35.1
OUTB_P: C56.2 C60.1 L3.P$2 OUT_B_+.1 R36.1
OUTC_N: C86.2 C88.1 L10.P$2 OUT_C_-.1 R53.1
OUTC_P: C86.1 C87.2 L9.P$2 OUT_C_+.1 R52.1
OUTD_N: C81.1 C84.2 L8.P$2 OUT_D_-.1 R49.1
OUTD_P: C80.2 C84.1 L7.P$2 OUT_D_+.1 R50.1
P12V_EN: REG1.3
POT0: R9.S U1.26
POT1: R10.S U1.27
POT2: R11.S U1.28
POT3: R12.S U1.29
R12V_SW: C5.2 D1.2 L1.P$1 REG1.8
V+: C1.+ C2.+ C7.1 C49.+ C50.+ C51.1 C52.1 C53.1 C54.1 C73.+ C74.+ C75.1 C76.1 C77.1 C78.1 REG1.2 U2.6 U2.7 U2.12 U2.13 U3.6 U3.7 U3.12 U3.13 U$1.+ VIN.1